# Altium PCB 遥控3.2.PcbDoc
Units mil, origin at the board's own origin, x right, y up, seen from the top; angles counter-clockwise.
Board outline 1181.1 x 1377.95 mil, 2 copper layers (Top Layer, Bottom Layer); 35 components, 21 nets, 101 pads, 33 vias.
Unrouted connection lines stored in the file: 22.
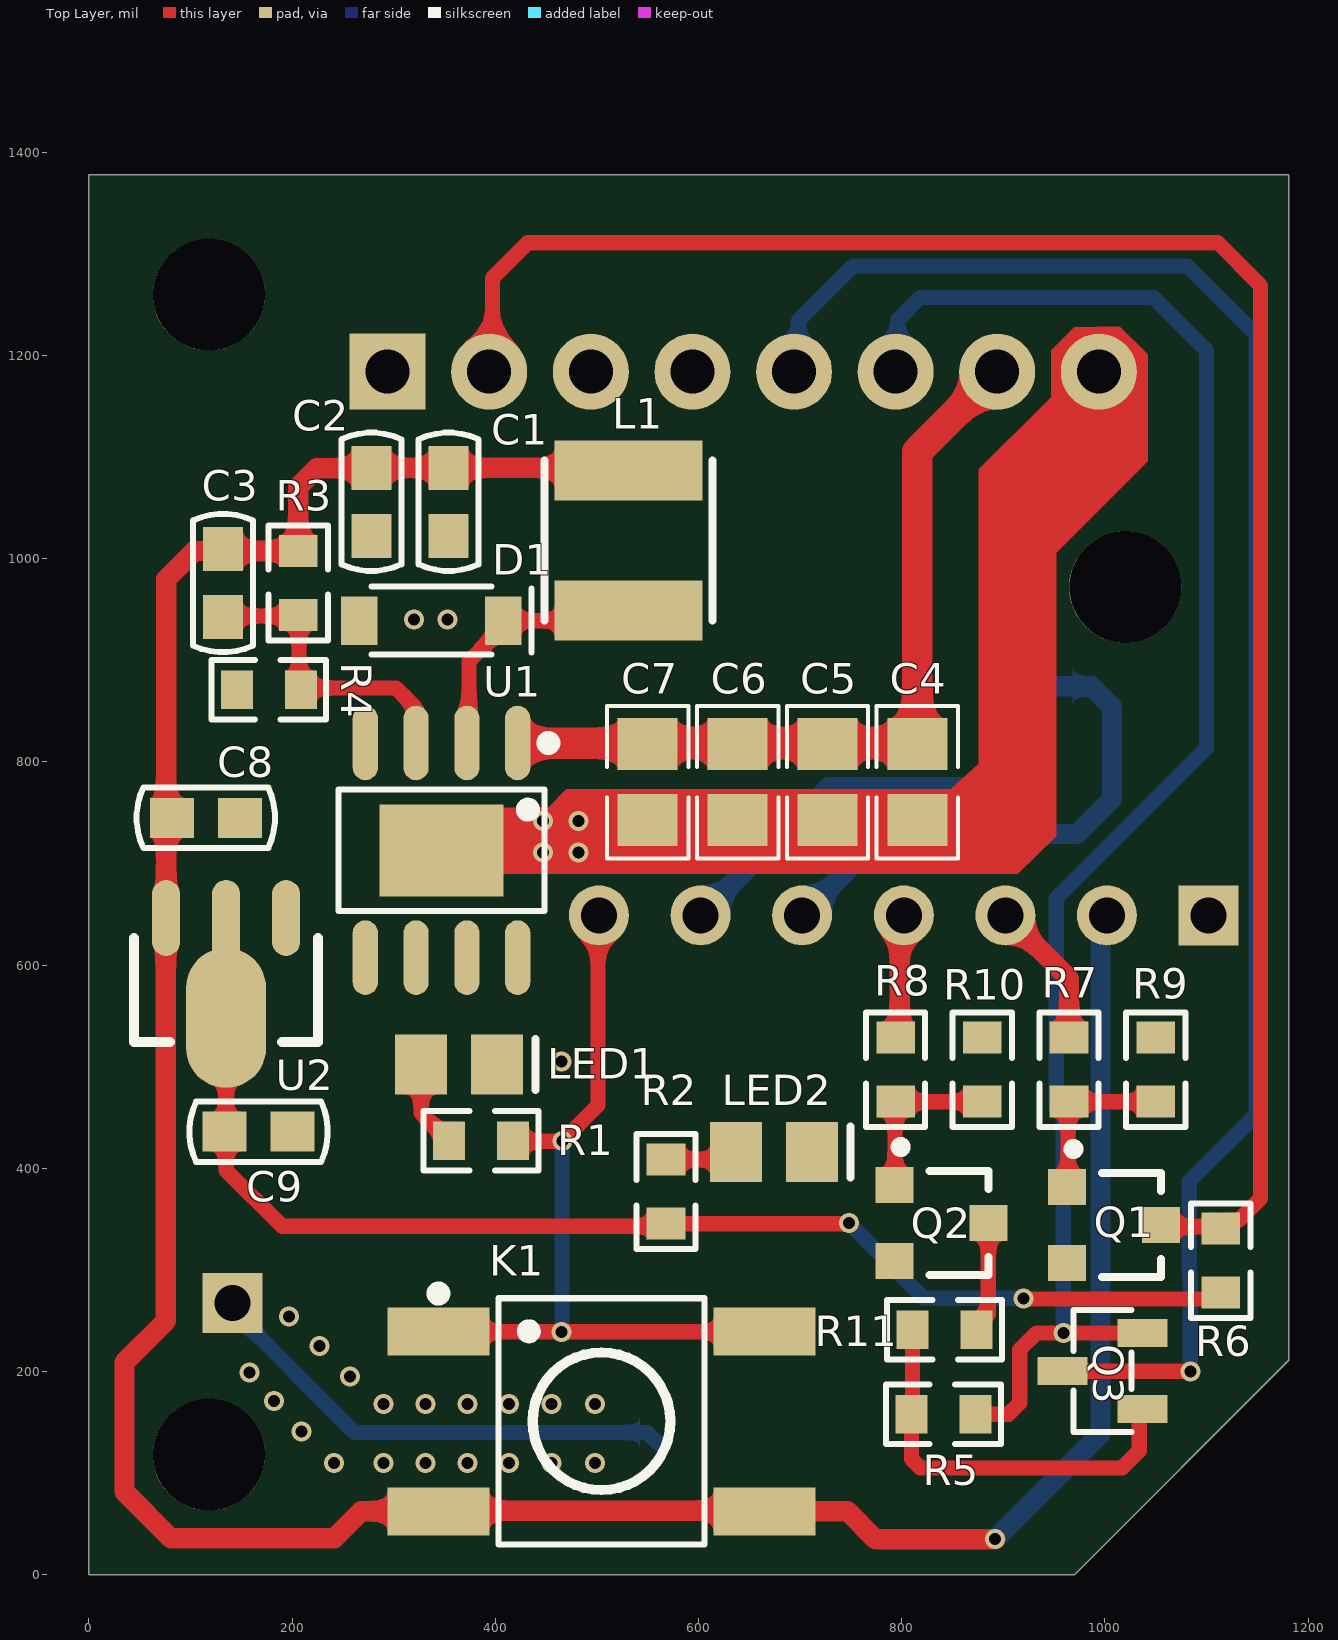
[diagram p0: Top Layer view]
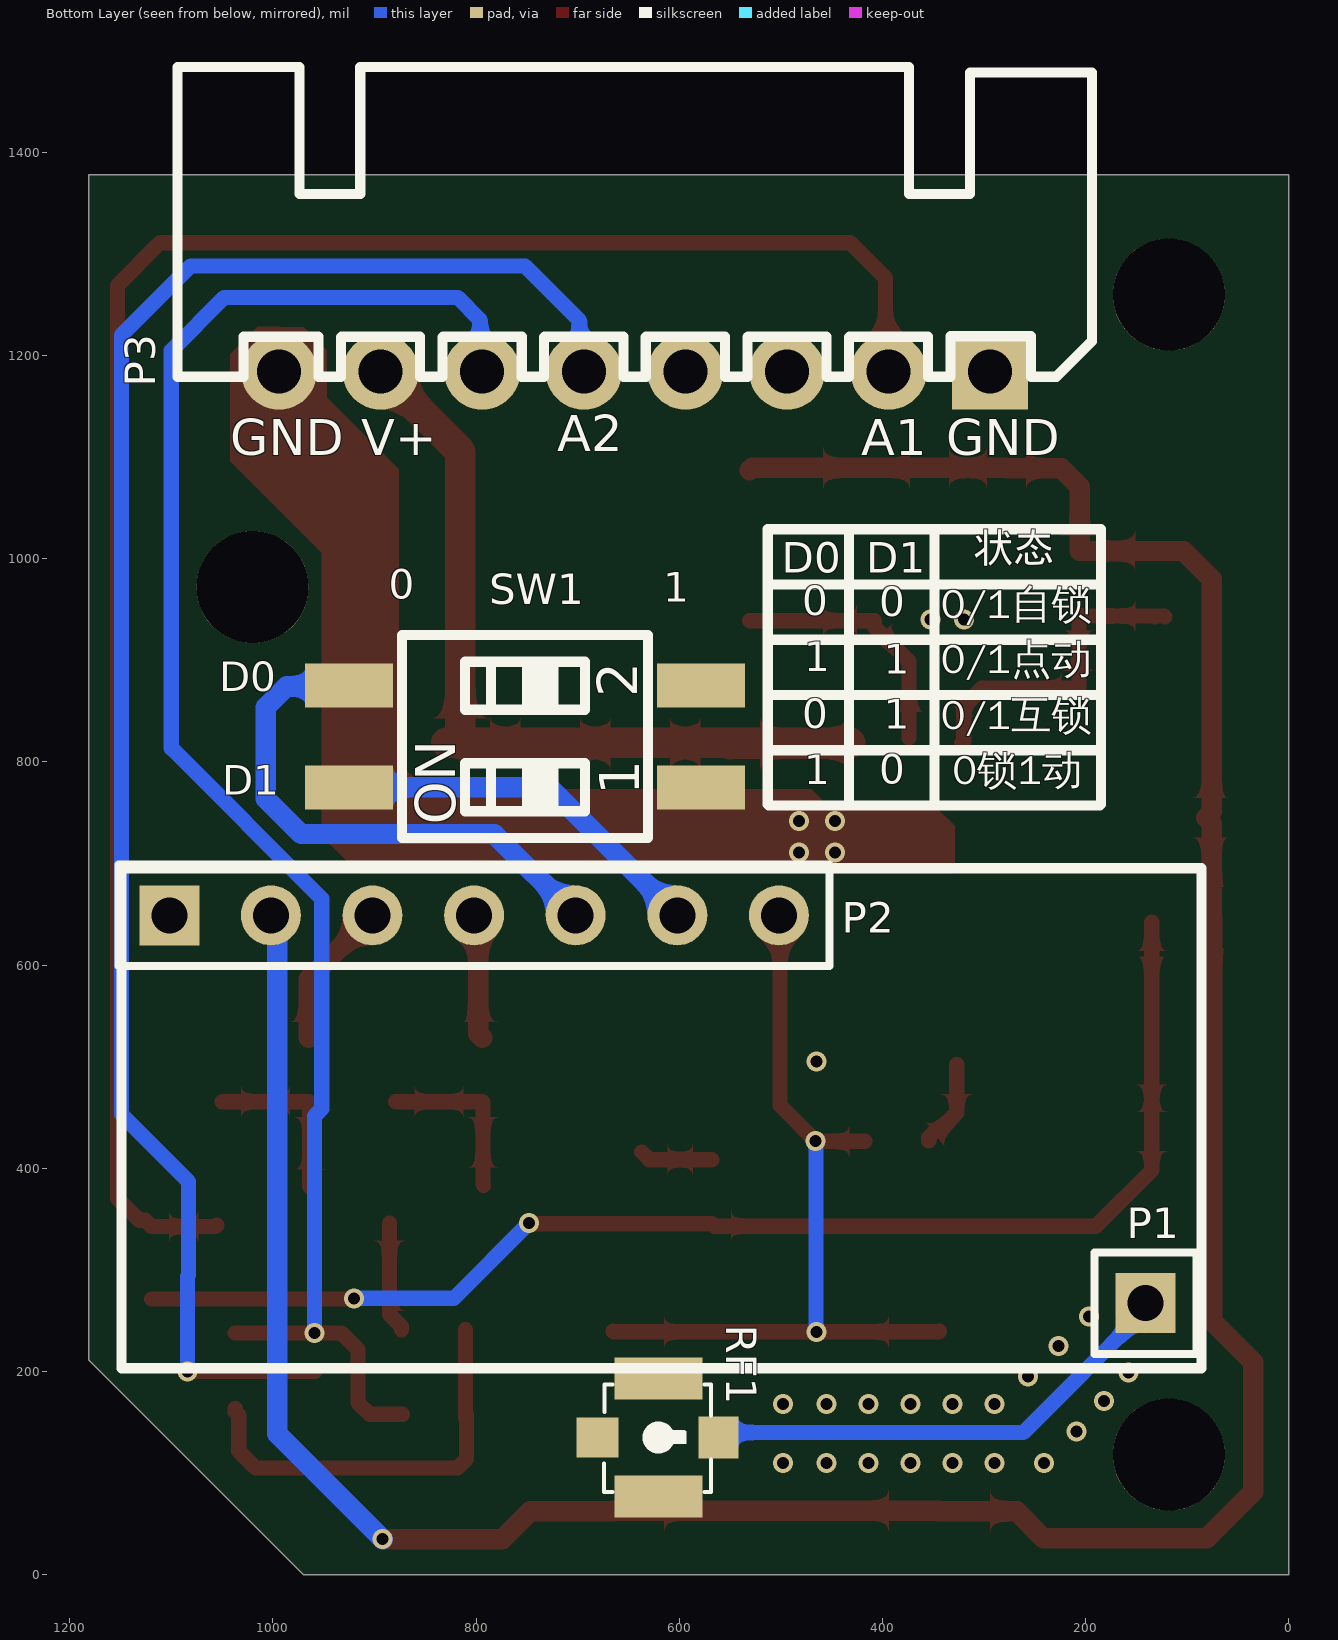
[diagram p1: Bottom Layer view, seen from below]
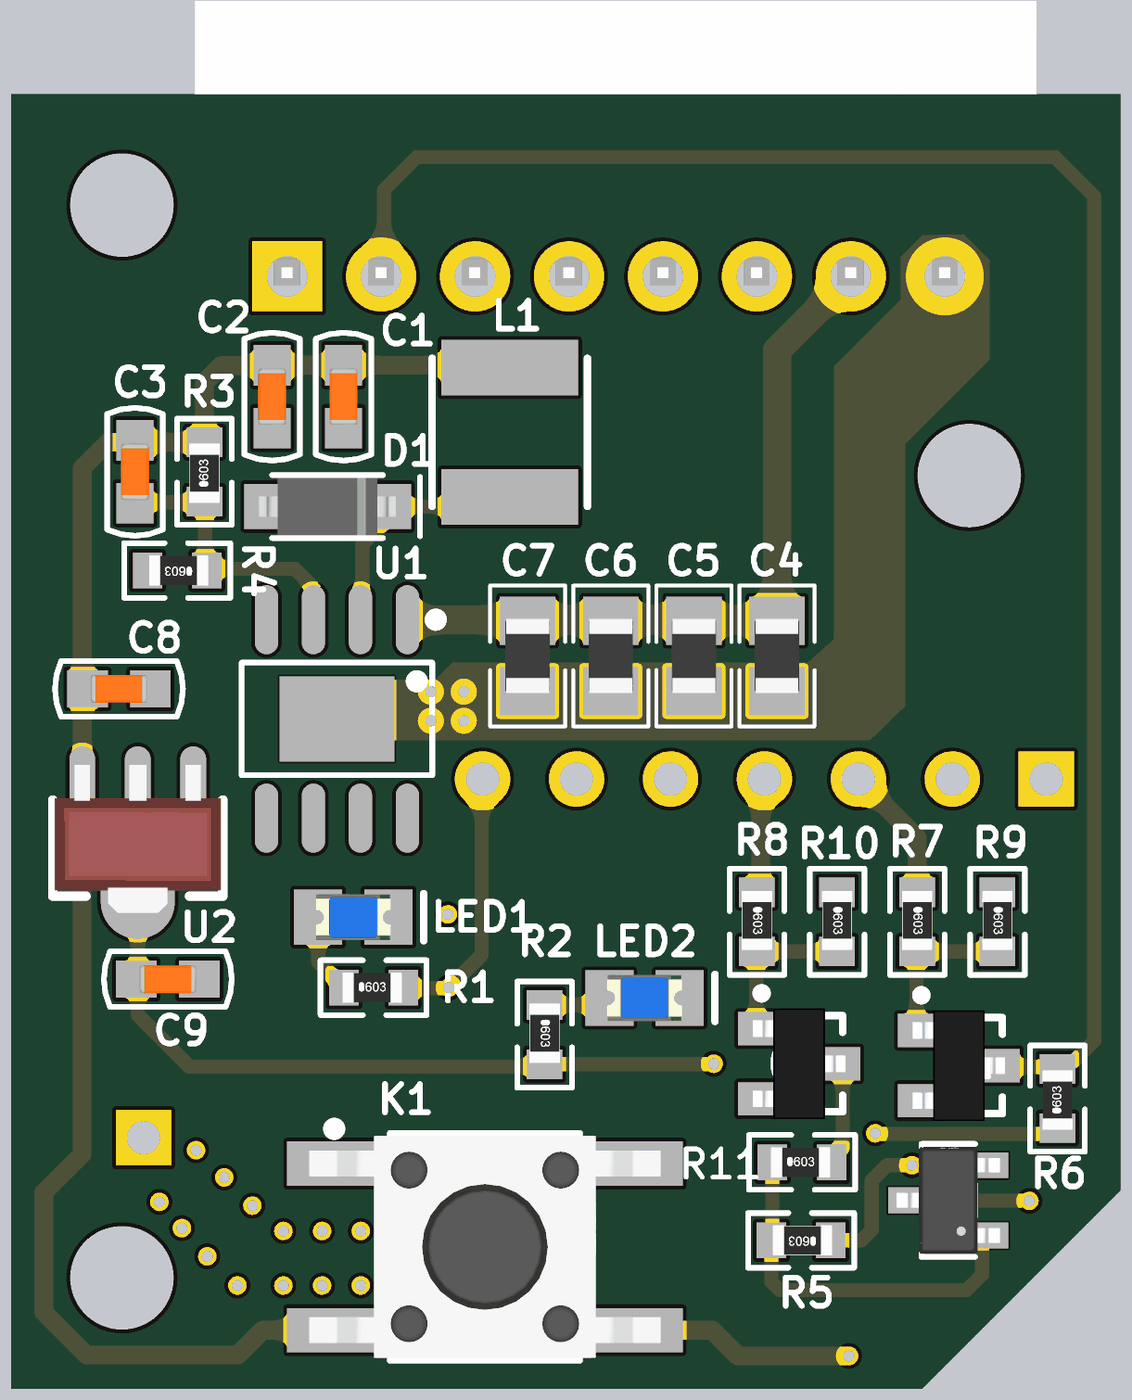
[diagram p2: 3D render of the assembled board from above, using the file's embedded part models]

## Layer stack, top to bottom
Top Solder: solder mask 0.4, Solder Resist, Dk 3.5
Top Layer: signal copper 1.4
Dielectric 1: dielectric 12.6, FR-4, Dk 4.8
Bottom Layer: signal copper 1.4
Bottom Solder: solder mask 0.4, Solder Resist, Dk 3.5

## Board outline
0,0 970,0 1181,211 1181.1,211 1181.1,1377.95 0,1377.95

## Design rules (kind name [scope] priority, off if disabled: settings)
BoardOutlineClearance [All] p1: gap=15 ignorepadtopadclearanceinfootprint=FALSE
Clearance [All] p1: gap=10 ignorepadtopadclearanceinfootprint=FALSE except(0: Arc-Hole Track-Hole SMDPad-Hole THPad-Hole Via-Hole Fill-Hole Poly-Hole Region-Hole Text-Hole)
PolygonConnect [All] p1: thpad.connectstyle=Relief thpad.reliefconductorwidth=30 thpad.reliefentries=4 thpad.polygonreliefangle="90 Angle" thpad.airgapwidth=8 smdpad.connectstyle=Relief smdpad.reliefconductorwidth=30 smdpad.reliefentries=4 smdpad.polygonreliefangle="90 Angle" smdpad.airgapwidth=8 via.connectstyle=Direct via.reliefconductorwidth=30 via.reliefentries=4 via.polygonreliefangle="90 Angle" via.airgapwidth=8
RoutingVias [All] p1: holewidth=11.81 width=19.68 viastyle="Through Hole" minholewidth=11.81 minwidth=19.68 maxholewidth=11.81 maxwidth=19.68
SolderMaskExpansion [All] p1: expansion=4 istentingtop=FALSE
Width [All] p1: maxlimit=30 minlimit=10 preferedwidth=10
30 further rules are at their usual default settings.

## Components (designator, comment, footprint, x,y, rotation, side; value= is the part's Value field where it differs from the comment)
C1 "1uF" CAP-0603 354,1056 r90 top
C2 "100nF" CAP-0603 278,1056 r90 top
C3 "33nF" CAP-0603 132,976 r90 top
C4 "10uF" 0805 815.4,780 r90 top
C5 "10uF" 0805 726.93,780 r90 top
C6 "100nF" 0805 638.47,780 r90 top
C7 "10nF" 0805 550,780 r90 top
C8 "10uF" CAP-0603 115,745 r180 top
C9 "10uF" CAP-0603 167,436 r180 top
D1 "S210" SOD-123 337,939 r0 top
K1 "SW-PB" SW-SMD_4P-L6.0-W6.0 504.5,151 r0 top locked
L1 "47uH" IND-SMD_L4.0-W4.0_FNR4012S 531,1018 r270 top
LED1 "LED" LED_0805 364.4,502 r0 top locked
LED2 "LED" LED_0805 674.4,416 r0 top locked
P1 "Plug" HEADER_1 141.17,267.27 r0 bottom
P2 "Header 7" HDR1X7 1102,649 r180 bottom
P3 "Header 8" XH2.54-W-8P 644,1184 r0 bottom
Q1 "SS8050" SOT-23 1009,344 r270 top
Q2 "SS8050" SOT-23 839,346 r270 top
Q3 "SP60P60T1" SOT-23-3_L2.9-W1.3-P1.90-LS2.4-BR 997.63,200.6 r0 top
R1 "1K" "0603 - duplicate1" 386,427 r0 top
R2 "1K" "0603 - duplicate1" 568,377 r270 top
R3 "10K" "0603 - duplicate1" 206,976 r90 top
R4 "3.3K" "0603 - duplicate1" 177,871 r180 top
R5 "100K" "0603 - duplicate1" 841,158 r180 top
R6 "4.7K" "0603 - duplicate1" 1114,309 r90 top value=10K
R7 "1K" "0603 - duplicate1" 964.67,497 r270 top value=10K
R8 "1K" "0603 - duplicate1" 794,497 r270 top value=10K
R9 "10K" "0603 - duplicate1" 1050,497 r270 top
R10 "10K" "0603 - duplicate1" 879.33,497 r270 top
R11 "100K" "0603 - duplicate1" 842,241 r0 top
RF1 "6GHz" CONN-SMD_GT-RF1125A-01G 621,135 r90 bottom
SW1 "DSWB02LHGET" SW-SMD_2P-L5.1-W6.2-P2.54-LS9.4-BL 751.77,825 r90 bottom
U1 "XL7005A" SOIC-8_L4.9-W3.9-P1.27-LS6.0-BL-EP3.1-1 347,713 r180 top
U2 "AMS1117-3.3" SOT89 134.99,597.2 r90 top

## Footprints (in the part's own frame and the unit in brackets; to place one, negate y for a bottom-side part, rotate by r counter-clockwise, add the part's x,y. Pads: shape width x height; smd on the part's side, far side on the other; paste and mask are expansions set on the pad)
"0603 - duplicate1" [mm] "贴片带丝印"
  rect 0.8x0.965 smd: 1(-0.8,0) 2(0.8,0)
  silkscreen extent -1.43,-0.74 1.44,0.74, body extent -0.84,-0.41 0.76,0.41, height 0.45
0805 [mm] "贴片带丝印"
  rect 1.3x1.5 smd: 1(-0.95,0) 2(0.95,0)
  silkscreen extent -1.91,-1.02 1.91,1.02, body extent -1,-0.6 1,0.6, height 0.85
CAP-0603 [mm] "贴片电容"
  rect 1.1x1 smd: 1(-0.85,0) 2(0.85,0)
  silkscreen extent -1.73,-0.75 1.73,0.75, body extent -0.76,-0.38 0.76,0.38, height 0.78
CONN-SMD_GT-RF1125A-01G [mm]
  rect 1.05x2.2 smd paste+0 mask+0.05: 1(-1.475,-0.012) 3(1.475,-0.012)
  rect 1x1.05 smd paste+0 mask+0.05: 2(0,1.513)
  rect 1.05x1 smd paste+0 mask+0.05: 4(0,-1.513)
  silkscreen extent -1.36,-1.32 1.33,1.35
HDR1X7 [mm] "Connector; Header; 7 Position"
  rect 1.5x1.5 hole 0.9: 1(0,0)
  round 1.5 hole 0.9: 2(2.54,0) 3(5.08,0) 4(7.62,0) 5(10.16,0) 6(12.7,0) 7(15.24,0)
  silkscreen extent -1.27,-1.27 16.51,1.27
HEADER_1 [mm] "2.54排针-3x1"
  rect 1.5x1.5 hole 0.9: 1(0,0)
  silkscreen extent -1.27,-1.27 1.27,1.27
IND-SMD_L4.0-W4.0_FNR4012S [mm]
  rect 1.5x3.7 smd: 1(-1.75,0) 2(1.75,0)
  silkscreen extent -2,-2.1 2,2.1
LED_0805 [mm] "贴片二极管"
  rect 1.3x1.5 smd: 1(-0.95,0) 2(0.95,0)
  silkscreen extent 1.91,-0.64 1.91,0.64, body extent -1.01,-0.62 1.01,0.62, height 1.1
SOD-123 [mm]
  rect 0.91x1.22 smd: 1(-1.8,0) 2(1.8,0)
  silkscreen extent -1.5,-0.85 2.5,0.85, body extent -1.85,-0.77 1.85,0.78, height 1.18
SOIC-8_L4.9-W3.9-P1.27-LS6.0-BL-EP3.1-1 [mm]
  oval 0.63x1.865 smd: 1(-1.905,-2.683) 2(-0.635,-2.683) 3(0.635,-2.683) 4(1.905,-2.683) 5(1.905,2.682) 6(0.635,2.682) 7(-0.635,2.682) 8(-1.905,2.682)
  rect 3.1x2.3 smd paste+0 mask+0.05: 9(0,0)
  silkscreen extent -2.82,-2.83 2.58,1.52
SOT89 [mm] "SOT89封装"
  oval 1.9x0.7 smd: 1(1.25,-1.5) 3(1.25,1.5)
  oval 3.5x2 smd: 2(-1.25,0)
  oval 2.1x0.7 smd: 2(1.151,0)
  silkscreen extent -1.85,-2.3 0.75,2.3, body extent -2.3,-2.25 1.7,2.25, height 1.5
SOT-23 [mm]
  rect 0.9x0.95 smd: 1(-0.95,-1.175) 2(0.95,-1.175) 3(0,1.175)
  silkscreen extent -2.03,-1.14 1.3,1.18, body extent -1.5,-1.25 1.5,1.25, height 1.15
SOT-23-3_L2.9-W1.3-P1.90-LS2.4-BR [mm]
  rect 1.25x0.7 smd mask+0.051: 1(1,-0.95) 2(1,0.95) 3(-1,0)
  silkscreen extent -0.73,-1.53 0.73,1.53, body extent -1.4,-1.45 1.4,1.45, height 1.4
SW-SMD_2P-L5.1-W6.2-P2.54-LS9.4-BL [mm]
  rect 1.1x2.2 smd: 1(-1.27,-4.4) 2(1.27,-4.4) 3(1.27,4.4) 4(-1.27,4.4)
  silkscreen extent -2.54,-3.08 2.54,3.07, body extent -2.55,-4.7 2.54,4.7, height 3.97
SW-SMD_4P-L6.0-W6.0 [mm]
  rect 2.55x1.2 smd: 1(-4.075,2.25) 1(4.075,2.25) 2(-4.075,-2.25) 2(4.075,-2.25)
  silkscreen extent -4.22,-3.08 2.57,3.34, body extent -4.75,-3 4.75,3, height 7.42
XH2.54-W-8P [mm] "接插件，8P"
  rect 1.9x1.9 hole 1.1: 1(-8.89,0)
  round 1.9 hole 1.1: 2(-6.35,0) 3(-3.81,0) 4(-1.27,0) 5(1.27,0) 6(3.81,0) 7(6.35,0) 8(8.89,0)
  silkscreen extent -11.43,-7.62 11.43,0.13, body extent -11.4,-7.45 11.38,0.25, height 2.89

## Part data
C1 C2 C3 C4 C5 C6 C7 C8 C9: library part Cap, "无极性电容", LatestRevisionDate=17-Jul-2002, LatestRevisionNote="Re-released for DXP Platform.", PackageReference=RAD-0.3, Published=8-Jun-2000, Publisher="Altium Limited"
D1: library part B340A, LCSC Assembly=Yes, Manufacturer=MDD, image=//image.lceda.cn/szlcsc/C64982.jpg, Manufacturer Part=B340A, SMT Type=Extend, spicePre=D, spiceSymbolName=B340A, Supplier=LCSC, Supplier Part=C64982
K1: "微动开关", LatestRevisionDate=17-Jul-2002, LatestRevisionNote="Re-released for DXP Platform.", PackageReference=SPST-2, Published=24-Mar-1999, Publisher="Altium Limited", Suppliter Part=C961737
L1: library part 68uH, Manufacturer=SXN, Manufacturer Part=SMDRI127-680MT, nameAlias=Inductance, spicePre=L, spiceSymbolName=SMDRI127-680MT, Supplier=LCSC, Supplier Part=C9907
LED1 LED2: "发光二极管", LatestRevisionDate=08-Jul-2005, LatestRevisionNote="Mech Layer 1 removed.", PackageReference=LED-0, Published=8-Jun-2000, Publisher="Altium Limited"
P1: "安装孔", LatestRevisionDate=17-Jul-2002, LatestRevisionNote="Re-released for DXP Platform.", Publisher="Altium Limited"
P2: "Header, 7-Pin", LatestRevisionDate=17-Jul-2002, LatestRevisionNote="Re-released for DXP Platform.", Publisher="Altium Limited"
P3: "Header, 8-Pin", LatestRevisionDate=17-Jul-2002, LatestRevisionNote="Re-released for DXP Platform.", Publisher="Altium Limited"
Q1 Q2: "NPN贴片三极管", PackageDocument=Sep-1998, Code_JEDEC=TO-92A, ComponentLink1Description="Manufacturer Link", ComponentLink1URL=http://www.fairchildsemi.com/, ComponentLink2Description=Datasheet, ComponentLink2URL=http://www.fairchildsemi.com/ds/2N%2F2N3904.pdf, DatasheetDocument=1997, LatestRevisionDate=15-Jan-2003, LatestRevisionNote="PCB Footprint 'BCY-W3/D4.7' replaced", PackageReference=TO-92A, Published=8-Jun-2000, Publisher="Altium Limited"
Q3: library part PMOS-2, "P-Channel Power MOSFET", ComponentLink1Description="Manufacturer Link", ComponentLink1URL=http://www.irf.com/, DatasheetVersion=PD-9.390D, LatestRevisionDate=17-Jul-2002, LatestRevisionNote="Re-released for DXP Platform.", Note="Pin 4 not drawn and electrically connected to Pin 2.", PackageDescription="TO, Thru-Hole, Vertical, Heatsink Mounted; 3 In-Line Leads; Pitch 2.54 mm", PackageReference=TO-220AB, PackageVersion=Feb-1997, Published=8-Jun-2000, Publisher="Altium Limited"
R1 R2 R5 R6 R7 R8 R9 R10 R11: library part Res, "贴片电阻", LatestRevisionDate=17-Jul-2002, LatestRevisionNote="Re-released for DXP Platform.", PackageReference=AXIAL-0.4, Published=8-Jun-2000, Publisher="Altium Limited"
R3: library part 1K, LCSC Assembly=Yes, Manufacturer=UniOhm, Manufacturer Part=0603WAF1001T5E, nameAlias="Resistance (Ohms)", SMT Type=Basic, spicePre=R, spiceSymbolName=0603WAF1001T5E, Supplier=LCSC, Supplier Part=C21190
R4: library part 3K, LCSC Assembly=Yes, Manufacturer=UniOhm, Manufacturer Part=0603WAF3001T5E, nameAlias="Resistance (Ohms)", SMT Type=Basic, spicePre=R, spiceSymbolName=0603WAF3001T5E, Supplier=LCSC, Supplier Part=C4211
RF1: library part GT-RF1125A-01G, JLCPCB Part Class="Extended Part", LCSC Part Name="内针 IPEX 立贴", Manufacturer=G-Switch(品赞), Operating Temperature Range=-40℃~+90℃, Add into BOM=yes, Connector Type=板端, Convert to PCB=yes, Datasheet=https://atta.szlcsc.com/upload/public/pdf/source/20240806/E29158DC2BBCFBE0FBB4FF318E1913A6.pdf, Device=GT-RF1125A-01G, Impedance=20mΩ, Interface=内针, Interface Diameter=2mm, Interface Length/Height=1.25mm, Manufacturer Part=GT-RF1125A-01G, Number of Ports=1, RF Series=IPEX, Style=立贴, Supplier=LCSC, Supplier Footprint=SMD, Supplier Part=C5299419, Symbol=GT-RF1125A-01G
SW1: "C6331180", Symbol=DSWB02LHGET
U1: Frequency - Switching=150kHz, JLCPCB Part Class="Extended Part", LCSC Part Name="0.4A 150kHz 80V 降压型DC-DC转换器", Manufacturer=XLSEMI(芯龙), Operating Temperature=-40℃~+125℃@(TJ), Output Current=400mA, Output Voltage=1.25V~20V, Quiescent Current=2.5mA, Voltage - Supply=5V~80V, Add into BOM=yes, Convert to PCB=yes, Datasheet=https://atta.szlcsc.com/upload/public/pdf/source/20150821/1457707346919.pdf, Device=XL7005A, Function=降压型, Manufacturer Part=XL7005A, Number of Outputs=1, Output Type=可调, Supplier=LCSC, Supplier Footprint=SOIC-8-EP, Supplier Part=C50848, Switch tube (built-in/external)=内置, Symbol=XL7005A, Synchronous Rectifier=否, Topology=降压式
U2: library part AMS1117, "3.3V稳压芯片"

## Free pads (board coordinates)
  round 110.24 hole 110.24 unplated: 0(118.11,118.11) 0(118.11,1259.84) 0(1020,972)

## Via types
v1: diameter 19.68, hole 11.81, Top Layer to Bottom Layer, 33 vias

## Nets (pads, with @x,y where several pads share a name; then routed paths per layer and width w, separated by ;. In a path a pad name is that pad's centre, name@x,y a point inside that pad or via, vN(x,y) a via of type N, cw(c..) or ccw(c..) an arc to the next point about the centre after c; other vN are vias at no path point)
+3.3V: C9.2 R2.2 R6.1 U2.2 | length 1284.1
  Top Layer w15: U2.2@135,642.5 135,548 135,398 190,343 565.5,343 R2.2 747.5,345.5 v1(748,346) ; v1(920,272) 920.62,271.38 R6.1@1119.62,271.38
  Bottom Layer w15: v1(748,346) 822,272 v1(920,272)
+5V: C1.2 C2.2 C3.2 C8.2 K1.2 L1.1 P2.2 R3.2 U2.3 | length 3016.3
  Top Layer w20: K1.2@344.07,62.42 268.04,62.42 241.62,36 80.71,36 35,81.71 35,209 75.63,249.63 75.63,646.09 U2.3 75.95,739.41 C8.2 75.95,750.59 75.95,979.95 103.5,1007.5 132,1007.5 R3.2 206,1071 224.03,1089.03 277.57,1089.03 C2.2 C1.2 528.43,1089.46 L1.1 ; K1.2@344.07,63 K1.2@664.93,63 ; K1.2@664.93,62.42 746.69,62.42 774.11,35 v1(892,35)
  Bottom Layer w20: v1(892,35) 995.64,138.64 995.64,642.64 P2.2
A1: P3.2 Q1.3 R6.2 | length 1889.7
  Top Layer w15: P3.2 397.11,1187.11 397.11,1276.11 432,1311 1111,1311 1153,1269 1153,370.25 1131.5,348.74 1125.5,348.74 1119.75,343 1119.75,342.75 1056.51,342.75 Q1.3
A2: P3.5 Q3.3 | length 1727
  Top Layer w15: Q3.3 958.56,200.3 1083.7,200.3 v1(1084,200)
  Bottom Layer w15: P3.5 698.36,1188.36 698.36,1234.36 752,1288 1081,1288 1149.03,1219.97 1149.03,453.07 1083,387.04 1083,294.65 1084,293.65 v1(1084,200)
ANT: P1.1 RF1.4 | length 475.1
  Bottom Layer w15: P1.1@141.17,260.27 261.44,140 549.46,140 RF1.4@561.45,128.01
D0: P2.3 R7.1 | length 146.5
  Top Layer w20: P2.3 964.67,586.33 R7.1
D1: P2.4 R8.1 | length 123.8
  Top Layer w20: R8.1 798,532.5 798,645 P2.4
D2: P2.5 SW1.3 | length 533.5
  Bottom Layer w20: P2.5 782,729 972.24,729 1007,763.76 1007,854 986.59,874.41 925.59,874.41 SW1.3
D3: P2.6 SW1.4 | length 375.2
  Bottom Layer w20: P2.6 728,775 SW1.4
EN_V+: P3.6 Q3.2 R5.1 | length 1646.1
  Top Layer w15: R5.1 905,158 916.15,169.15 916.15,221.63 932.53,238 v1(959,238) Q3.2
  Bottom Layer w15: P3.6 796.11,1186.11 796.11,1235.11 818,1257 1048,1257 1100,1205 1100,813.51 952,665.51 952,458.39 959,451.39 v1(959,238)
GND: C1.1 C2.1 C4.1 C5.1 C6.1 C7.1 C8.1 C9.1 D1.1 LED1.2 LED2.2 P2.1 P3.1 P3.8 Q1.2 Q2.2 R4.2 R9.1 R10.1 RF1.1 RF1.2 RF1.3 SW1.1 SW1.2 U1.5 U1.6 U1.7 U1.8 U1.9 U2.1
  other v1: 241,110 290,110 331.2,110 372.4,110 413.6,110 455.17,110 498,110 209,141 290,168 331.2,168 372.4,168 413.6,168 455.17,168 498,168 182,171 257,195 158,199 227,225 197,254 465,505 447,711 482,711 447,742 482,742 320,940 353,940
NetC3_1: C3.1 R3.1 R4.1 U1.3 | length 314
  Top Layer w15: C3.1@122,942.54 122.98,943.52 C3.1@132,943.52 ; C3.1 132.98,943.52 205.02,943.52 R3.1 ; R3.1@206.74,943.76 206.74,872.83 302.1,872.83 320.13,854.8 320.13,820.49 U1.3
NetD1_2: D1.2 L1.2 U1.2 | length 252.9
  Top Layer w15: U1.2@374,823.41 373.88,823.53 373.88,851.73 374,851.85 374,899.03 407.87,932.9 D1.2 530.9,939 L1.2@531,939.1
NetLED1_1: LED1.1 R1.1 | length 88.3
  Top Layer w15: LED1.1 327,454.5 343.01,438.5 346.26,438.5 354.5,430.25 R1.1
NetLED2_1: LED2.1 R2.1 | length 72.1
  Top Layer w15: R2.1 629.5,408.5 LED2.1
NetQ1_1: Q1.1 R7.2 R9.2 | length 170.2
  Top Layer w15: Q1.1 963.7,382.37 963.7,464.54 R7.2 R9.2
NetQ2_1: Q2.1 R8.2 R10.2 | length 168
  Top Layer w15: Q2.1 793.37,384.03 793.37,464.87 R8.2 R10.2
NetQ2_3: Q2.3 R11.2 | length 109.9
  Top Layer w15: R11.2 873.5,244.25 885.26,256.01 Q2.3
NetQ3_1: Q3.1 R5.2 R11.1 | length 409.1
  Top Layer w15: R5.2 809.5,113.79 818.29,105 1017,105 1033.71,121.71 1033.71,156.92 1037,160.21 Q3.1 ; R5.2@810.5,153.75 R11.1
V+: C4.2 C5.2 C6.2 C7.2 P3.7 U1.1 | length 905.2
  Top Layer w30: U1.1@432,818.61 432.61,818.01 549.39,818.01 C7.2 ; 442,818.61 C4.2@829.55,818.61 ; C4.2 815.4,1105.4 P3.7
VT: K1.1 P2.7 R1.2 | length 787.8
  Top Layer w15: K1.1@344.07,239.58 344.64,239 v1(465,239) 664.36,239 K1.1@664.93,239.58 ; R1.2@417.5,426.5 465.5,426.5 v1(466,427) 501,462 501,641 P2.7@502,642
  Bottom Layer w15: v1(465,239) 465.5,239.5 465.5,425.23 v1@466,425.73 ; v1@465.5,427.5 v1(466,427)
pads on no net: P3.3 P3.4 U1.4

## Other copper
Top Layer:
  region net GND: 333,690 329,694 329,737 347,755 452,755 470,773 848,773 876,798 876,1088 947,1159 947,1205 969.9,1227.9 1014.22,1228.78 1042,1201 1042,1096 952,1006 952,940 952,726.63 914.1,690
  pour cut-out: 448.17,1126.42 448.17,909.57 613.83,909.57 613.83,1126.42
Bottom Layer:
  pour cut-out: 448,1127 448,910 614,910 614,1125 613,1126

## Silkscreen, mask and mechanical layers (free items; w line width, h text height)
Bottom Overlay:
  lines w10: 185,865.8 513,865.8 ; 185,920.2 513,920.2 ; 185,974.6 513,974.6 ; 349,757 349,1029 ; 433,757 433,1029 ; 512,757 186,757 185,758 185,811.4 ; 513,758 513,811.4 ; 185,811.4 185,1029 513,1029 513,811.4 ; 185,811.4 513,811.4 ; 86.01,203.1 86.01,695.23 1149,695.23 1149,203.1 86.01,203.1
  text "A2" at 720.09,1105.91 h35.43
  text "GND" at 337.09,1101.91 h35.43
  text "A1" at 421.09,1101.91 h35.43
  text "V+" at 913.09,1101.91 h35.43
  text "GND" at 1042.09,1101.91 h35.43
  text "状态" at 310.95,986.53 h50
  text "D1" at 416,986 h30
  text "D0" at 499,986 h30
  text "0" at 886,950.55 h50
  text "1" at 616,948 h50
  text "0" at 479,934.55 h50
  text "0" at 403,933.55 h50
  text "0/1自锁" at 342,931.34 h50
  text "1" at 476.9,879.22 h50
  text "0/1点动" at 342,877.34 h50
  text "1" at 398.9,877 h50
  text "D0" at 1053,859.55 h50
  text "1" at 398.9,823 h50
  text "0" at 479,823.33 h50
  text "0/1互锁" at 342,822.2 h50
  text "0" at 403,768.55 h50
  text "0锁1动" at 331,768.34 h50
  text "1" at 476.9,768 h50
  text "D1" at 1050,758 h50
Mechanical 1:
  lines w20: 1181,211 970,0 0,0 0,1377.95 1181.1,1377.95 1181.1,211

## Text inside footprints (layer, text, board x,y; h text height)
SW1: Bottom Overlay "2" at 641.53,863.58 h39.37 r270; Bottom Overlay "1" at 639.56,767.13 h39.37 r270; Bottom Overlay "ON" at 820.67,737.99 h39.37 r270